# Altium PCB PCB1.PcbDoc (part 2 of 2)
Units mm, origin at the board's own origin, x right, y up, seen from the top; angles counter-clockwise.
Board outline 893.19 x 388.24 mm, 2 copper layers (Top Layer, Bottom Layer); 223 components, 120 nets, 683 pads, 243 vias.
Unrouted connection lines stored in the file: 6.
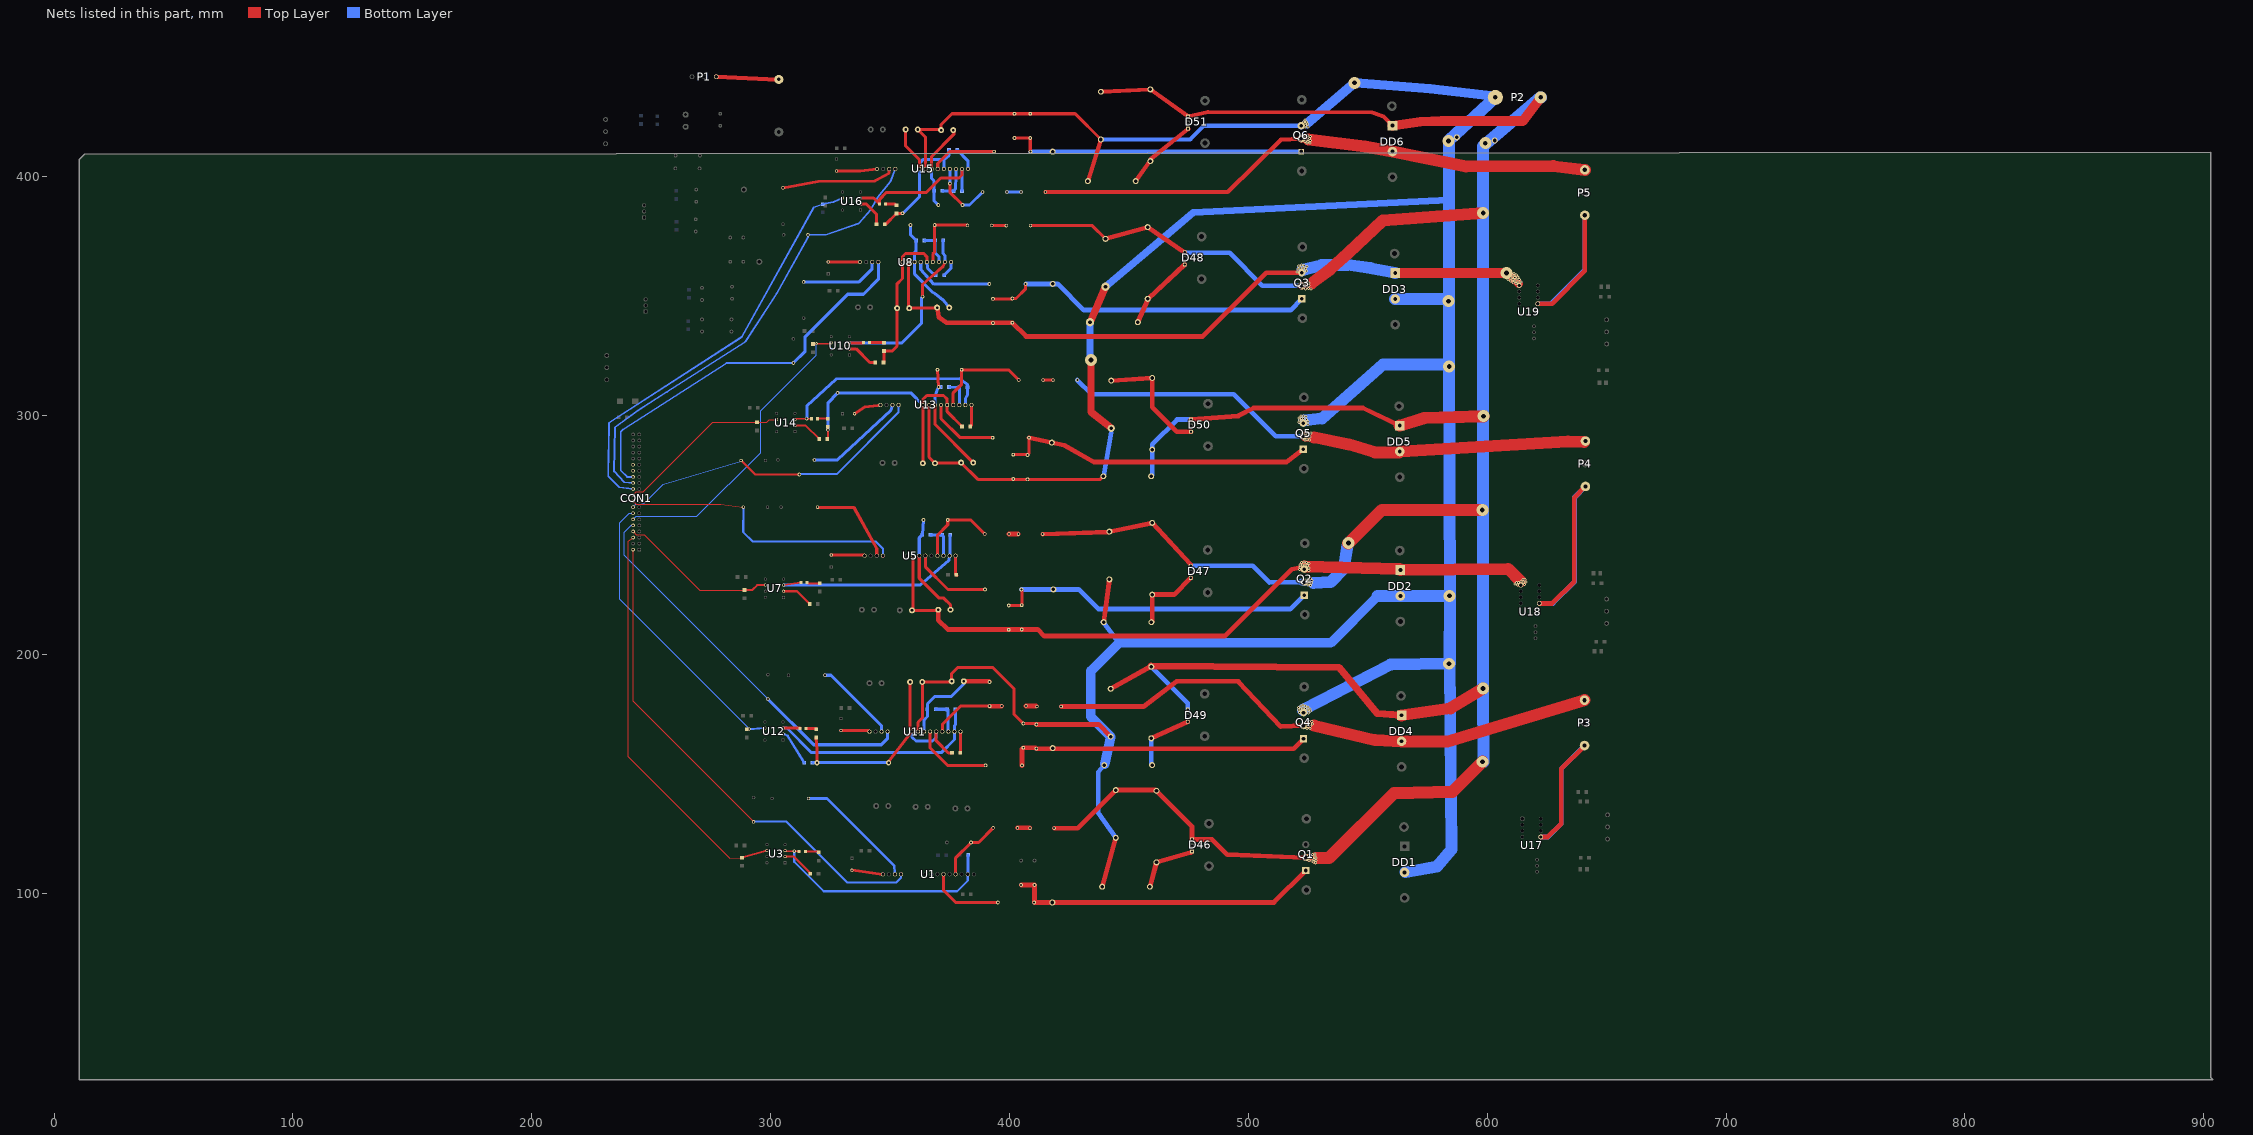
[diagram p2: the nets of this part, all layers, seen from the top]

## Via types
v1: diameter 1.27, hole 0.3, Top Layer to Bottom Layer, 178 vias
v2: diameter 2.2, hole 1, Top Layer to Bottom Layer, 18 vias
v3: diameter 5, hole 2, Top Layer to Bottom Layer, 15 vias
v4: diameter 1.524, hole 0.813, Top Layer to Bottom Layer, 13 vias
v5: diameter 1.27, hole 0.711, Top Layer to Bottom Layer, 11 vias
v6: diameter 4, hole 3.5, Top Layer to Bottom Layer, 4 vias
v7: diameter 1.778, hole 0.711, Top Layer to Bottom Layer, 2 vias
v8: diameter 1.6, hole 0.8, Top Layer to Bottom Layer, 1 vias
v9: diameter 2.032, hole 0.889, Top Layer to Bottom Layer, 1 vias

## Nets (pads, with @x,y where several pads share a name; then routed paths per layer and width w, separated by ;. In a path a pad name is that pad's centre, name@x,y a point inside that pad or via, vN(x,y) a via of type N, cw(c..) or ccw(c..) an arc to the next point about the centre after c; other vN are vias at no path point) (continued)
NetC21_2: C21.2 C22.1 D11.1 DD2.C Q2.3 R11.1 U5.9 U18.1 | length 300.7
  Top Layer w1.27: U5.9@359.664,241.3 359.664,218.948 C21.2@359.156,218.44 369.951,218.44 C22.1@370.205,218.694 ; DD2.C@563.287,235.67 DD2.C@563.626,235.331 ; v1@613.918,230.632 U18.1@614.045,228.981
  Top Layer w2: C22.1@370.205,218.694 370.205,214.376 374.142,210.439 R11.1@405.13,210.439 411.734,210.439 414.528,207.645 490.093,207.645 518.118,235.67 Q2.3@523.494,236.728
  Top Layer w5: Q2.3@523.494,236.728 DD2.C@563.287,235.67 ; DD2.C@563.626,235.331 608.711,235.839 v1@613.918,230.632
  other v1: 612.648,229.108 615.569,229.235 611.632,229.489 612.267,229.997 613.156,230.124 615.061,230.251 616.204,230.251 614.045,230.505 615.823,231.267 614.934,231.394 525.272,235.077 521.462,235.585 525.272,236.22 521.716,236.474 524.637,237.109 521.716,237.49 522.732,237.49 523.621,237.49 525.399,238.125 522.224,238.506 524.383,238.506 523.24,238.76
NetC22_2: C22.2 C24.1 D12.A U5.10 | length 44.7
  Top Layer w1.27: U5.10@362.204,241.3 362.204,231.902 370.586,223.52 372.491,223.52 375.285,220.726 C22.2@375.285,218.694
  Bottom Layer w1.27: U5.10@362.204,241.3 362.204,248.793 C24.1@363.474,250.063 D12.A@363.982,256.286
NetC23_2: C23.2 U5.16 | length 8.5
  Top Layer w1.27: U5.16@377.444,241.3 377.444,233.553 C23.2@377.952,233.045
NetC24_2: C24.2 R16.2 U5.14 | length 13.9
  Bottom Layer w1.27: C24.2@366.903,250.063 R16.2@371.729,250.063 372.364,249.428 U5.14@372.364,241.3
NetC35_1: C35.1 C37.1 R27.2 R28.2 U8.8 U8.12 | length 70.3
  Top Layer w1.27: R28.2@347.218,322.199 347.472,322.453 R27.2@347.472,327.025 350.901,327.025 352.933,329.057 C35.1@352.933,344.932 352.806,345.059 352.806,354.965 355.219,357.378 U8.8@355.219,364.236 355.219,366.522 356.489,367.792 364.109,367.792 365.379,366.522 U8.12@365.379,364.236
  Bottom Layer w1.27: U8.12@365.379,364.236 365.633,361.696 367.538,359.791 C37.1@369.062,358.902
NetC35_2: C35.2 C36.1 D22.1 DD3.C Q3.3 R23.1 U8.9 U19.1 | length 296.7
  Top Layer w1.27: U8.9@357.759,364.236 357.759,345.186 C35.2@358.013,344.932 369.443,344.932 C36.1@369.697,345.186 C36.1@369.697,345.44
  Top Layer w2: C36.1@369.697,345.44 370.332,341.249 373.761,338.836 R23.1@401.193,338.836 406.908,333.121 480.822,333.121 507.45,359.749 Q3.3@522.351,359.749 ; U19.1@613.283,354.838 U19.1@613.41,354.457
  Top Layer w3: U19.1@613.156,355.219 U19.1@613.283,354.838
  Top Layer w3.5: v3@608.203,359.664 U19.1@613.156,355.219
  Top Layer w4: DD3.C@561.467,359.664 v3@608.203,359.664
  Bottom Layer w1.27: DD3.C@561.382,359.749 DD3.C@561.467,359.664
  Bottom Layer w3: Q3.3@522.351,359.749 Q3.3@522.605,360.934
  Bottom Layer w5: Q3.3@522.605,360.934 530.606,362.966 541.528,363.093 551.053,361.696 DD3.C@561.382,359.749
  other v1: 612.013,355.219 610.87,355.6 612.902,355.981 614.045,355.981 609.727,356.362 611.632,356.362 608.711,356.997 610.743,356.997 613.41,356.997 612.394,357.124 609.854,357.505 611.505,357.759 612.775,357.886 610.743,358.394 612.14,358.775 611.124,359.41 520.319,360.045 524.383,360.426 520.7,361.315 524.002,361.442 522.859,361.696 521.716,361.823 524.51,362.458 521.081,362.585 523.367,362.712 522.224,363.093
  other v3: 608.076,359.664
NetC36_2: C36.2 C38.1 D23.A U8.10 | length 42
  Bottom Layer w1.27: D23.A@358.521,379.73 358.521,375.666 C38.1@360.934,373.253 360.934,368.935 360.299,368.3 U8.10@360.299,364.236 360.299,359.156 367.792,351.663 368.554,351.155 372.237,348.361 C36.2@374.777,345.186
NetC37_2: C37.2 U8.16 | length 6.8
  Bottom Layer w1.27: C37.2@372.491,358.648 375.412,361.569 U8.16@375.539,364.236
NetC38_2: C38.2 R29.2 U8.14 | length 14.3
  Bottom Layer w1.27: C38.2@364.363,373.253 368.681,373.253 R29.2@368.808,373.38 368.808,368.173 370.459,366.522 U8.14@370.459,364.236
NetC44_1: C44.1 C46.1 R35.2 R36.2 U11.8 U11.12 | length 108.3
  Top Layer w1.27: R35.2@319.024,165.227 319.405,160.02 v2(319.405,154.686) ; v2@348.996,154.686 349.141,154.871 U11.8@359.156,167.64 358.394,168.402 C44.1@358.394,188.468 ; U11.12@369.316,167.64 369.316,163.83 374.396,158.75 C46.1@375.92,158.75
  Bottom Layer w1.27: R36.2@317.5,154.686 v2(319.405,154.686) v2@348.996,154.686 ; U11.8@359.156,167.64 359.156,165.354 360.807,163.703 367.792,163.703 369.316,165.227 U11.12@369.316,167.64
  other v2: 349.377,154.686
NetC44_2: C44.2 C45.1 C51.2 C52.1 C58.2 C59.1 C63.1 C64.1 C65.1 C68.1 C69.1 C70.1 C71.1 C72.1 C73.1 C74.1 C75.1 C76.1 D29.1 D36.1 D42.1 DD1.A DD2.A DD3.A P2.3 pad.0@587.248,416.433 Q4.3 Q5.3 Q6.3 R32.1 R40.1 R47.1 U11.9 U13.9 U15.9 | length 1552
  Top Layer w1.27: U11.9@361.696,167.64 361.696,171.577 363.474,173.355 C44.2@363.474,188.468 375.539,188.468 C45.1@375.793,188.722 375.793,192.024 378.206,194.437 393.065,194.437 401.955,185.547 401.955,174.879 D29.1@405.765,171.069 410.845,171.069 R32.1@411.226,170.688 ; U15.9@364.871,403.225 364.871,416.433 C58.2@361.569,419.735 371.094,419.735 C59.1@371.348,419.481 371.348,421.767 375.92,426.339 D42.1@402.082,426.339 R47.1@408.686,426.339 427.482,426.339 C73.1@438.277,415.544 ; U13.9@366.268,304.419 366.268,282.575 C51.2@368.808,280.035 379.476,280.035 C52.1@379.73,280.289 386.715,273.304 D36.1@407.543,273.304 438.023,273.304 C71.1@439.293,274.574 ; C68.1@433.578,338.709 C68.1@433.705,339.09 ; Q6.3@522.097,421.344 Q6.3@522.309,421.132
  Top Layer w1.778: C74.1@432.816,398.145 C73.1@438.277,415.544
  Top Layer w2: R32.1@411.226,170.688 437.261,170.688 C69.1@442.341,165.608 ; C68.1@433.578,338.709 C68.1@433.737,339.076 ; C64.1@438.785,102.743 C63.1@444.5,123.19 ; C75.1@439.42,213.487 C65.1@441.833,231.394
  Top Layer w3: C68.1@433.737,339.076 C76.1@440.182,353.949 ; v3(434.086,323.215) 434.086,301.498 C72.1@442.468,294.894
  Bottom Layer w1.27: C75.1@439.166,213.614 C75.1@439.42,213.487 ; C71.1@439.293,274.574 C71.1@439.42,274.828 ; C70.1@439.674,153.67 C70.1@439.801,154.051
  Bottom Layer w1.778: C73.1@438.277,415.544 475.615,415.544 481.415,421.344 Q6.3@522.097,421.344
  Bottom Layer w2: C75.1@439.166,213.614 439.322,213.411 445.897,204.851 ; C71.1@439.42,274.828 442.595,292.989 ; C70.1@439.674,153.67 437.134,150.749 437.134,133.731 C63.1@444.5,123.19
  Bottom Layer w3: v3@433.578,323.342 433.705,323.469 C68.1@433.705,339.09 ; C76.1@440.182,353.949 463.804,373.888 476.758,384.937 583.932,390.271
  Bottom Layer w3.048: Q6.3@522.097,421.344 v1@524.51,422.148 ; P2.3@603.25,433.705 P2.3@603.631,433.324
  Bottom Layer w4: C70.1@439.801,154.051 C69.1@442.341,165.608 434.086,173.863 434.086,193.04 445.897,204.851 534.543,204.851 554.143,224.451 ; v1@524.51,422.148 544.576,439.293 576.199,436.753 P2.3@603.25,433.705
  Bottom Layer w5: Q4.3@522.859,176.784 559.816,195.834 ; Q5.3@523.24,297.942 530.86,298.831 556.388,321.311 v3@584,321.311 ; 554.143,224.451 DD2.A@563.626,224.451 v3@583.269,224.451 ; 559.562,195.834 584.308,196.215 585.089,118.364 578.993,111.252 DD1.A@565.785,108.839 ; DD3.A@561.467,348.784 v3@583.869,348.784
  Bottom Layer w5.08: v3@583.869,348.784 v3@583.908,348.744 ; v3@584.308,196.215 584.327,223.393 584,321.311 v3@583.908,348.744 ; P2.3@603.377,433.197 583.946,415.163 583.946,414.909 583.932,390.271 v3@583.908,348.744
  other v1: 525.145,175.514 521.335,175.641 526.034,176.276 521.081,176.657 524.891,176.657 521.843,177.165 525.78,177.165 523.875,177.292 522.859,177.546 520.954,177.8 525.018,177.927 521.97,178.435 523.875,178.435 522.859,178.816 524.891,296.291 521.208,297.18 525.018,297.434 521.462,298.069 524.256,298.323 522.224,298.704 523.113,298.704 521.208,298.958 524.129,299.593 522.097,299.72 523.113,299.847 523.748,420.751 525.018,420.878 523.875,421.386 524.764,422.021 523.748,422.148 523.113,422.91 524.383,422.91 523.748,423.672
  other v3: 583.946,196.088 584.2,224.536 584.073,320.548 583.819,347.853 583.819,414.909 544.449,439.293
NetC45_2: C45.2 C47.1 D30.A U11.10 | length 43.1
  Top Layer w1.27: D30.A@391.414,188.722 D30.A@391.668,188.468
  Top Layer w2: C45.2@380.873,188.722 D30.A@391.414,188.722
  Bottom Layer w1.27: U11.10@364.236,167.64 364.109,167.767 364.109,172.466 365.633,173.99 C47.1@365.633,177.038 365.633,179.324 368.681,182.372 375.666,182.372 380.873,187.579 C45.2@380.873,188.722
NetC46_2: C46.2 U11.16 | length 8.9
  Top Layer w1.27: C46.2@379.349,158.75 379.476,158.877 U11.16@379.476,167.64
NetC47_2: C47.2 R37.2 U11.14 | length 14.5
  Bottom Layer w1.27: C47.2@369.062,177.038 373.761,177.038 374.269,176.911 374.269,168.148 U11.14@374.396,167.64
NetC51_1: C51.1 C53.1 R42.2 R43.2 U13.8 U13.12 | length 112.2
  Top Layer w0.381: R43.2@323.723,290.195 R43.2@323.977,290.449
  Top Layer w0.762: R43.2@323.977,290.449 R42.2@323.977,295.275
  Top Layer w1.27: C51.1@363.728,280.035 U13.8@363.728,304.419 363.728,306.705 365.379,308.356 372.364,308.356 373.888,306.832 U13.12@373.888,304.419 373.888,301.625 C53.1@380.111,295.402
  Bottom Layer w1.27: v4(323.977,294.005) 323.977,305.181 v4(328.041,309.499) 358.648,309.499 U13.8@363.728,304.419
NetC52_2: C52.2 C54.1 D37.A U13.10 | length 46.7
  Top Layer w1.27: U13.10@368.808,304.419 368.808,296.291 C52.2@384.81,280.289 ; D37.A@369.824,319.151 v4(370.332,311.912)
  Bottom Layer w1.27: U13.10@368.808,304.419 368.808,307.848 369.57,310.515 v4(370.332,311.912) C54.1@371.221,311.912
NetC53_2: C53.2 U13.16 | length 9.2
  Top Layer w1.27: C53.2@383.54,295.402 384.048,295.91 U13.16@384.048,304.419
NetC54_2: C54.2 R44.2 U13.14 | length 11.7
  Bottom Layer w1.27: C54.2@374.777,311.912 379.095,311.785 379.095,308.61 378.968,307.848 U13.14@378.968,304.419
NetC58_1: C58.1 C60.1 R49.2 R50.2 U15.8 U15.12 | length 72.2
  Top Layer w1.27: R50.2@347.726,380.111 348.234,380.111 R49.2@352.679,384.556 v4@355.346,384.556 ; C58.1@356.489,419.735 356.489,412.877 362.331,407.035 U15.8@362.331,403.225
  Bottom Layer w1.27: v4@355.346,384.556 362.331,391.541 U15.8@362.331,403.225 362.331,405.384 363.728,407.162 372.618,407.162 ; U15.12@372.491,403.225 372.618,407.162 ; C60.1@374.65,411.226 374.65,408.813 372.618,407.162
  other v4: 355.219,384.683
NetC59_2: C59.2 C61.1 D43.A U15.10 | length 36.6
  Top Layer w1.27: U15.10@367.411,403.225 367.411,408.432 376.682,417.703 376.682,419.227 C59.2@376.428,419.481
  Bottom Layer w1.27: U15.10@367.411,403.225 367.284,403.098 367.284,399.415 368.427,398.272 C61.1@368.427,394.081 368.427,389.89 D43.A@370.205,388.112
NetC60_2: C60.2 U15.16 | length 9.8
  Bottom Layer w1.27: C60.2@378.079,411.226 382.524,406.654 382.651,405.892 U15.16@382.651,403.225
NetC61_2: C61.2 R51.2 U15.14 | length 14.4
  Bottom Layer w1.27: C61.2@371.856,394.081 376.555,394.081 R51.2@376.682,393.954 377.444,394.97 377.571,400.304 377.571,402.971 U15.14@377.571,403.225
NetC63_2: C63.2 C65.2 C69.2 C71.2 C73.2 C76.2 D2.2 D10.2 D20.2 D46.1 D47.1 D48.1 D49.1 D50.1 D51.1 DD4.C DD5.C DD6.C P2.1 pad.0@603.123,415.163 Q1.2 Q2.2 Q3.2 R53.2 R54.2 R55.2 R56.2 R57.2 R58.2 | length 1477
  Top Layer w1.27: D20.2@408.813,379.476 434.655,379.476 C76.2@440.182,373.949 ; C65.2@441.452,251.206 C65.2@441.833,251.394 ; R53.2@461.231,143.19 R53.2@461.518,142.903 ; D48.1@473.329,368.3 D48.1@473.583,368.173 ; D47.1@475.869,237.109 D47.1@475.869,237.617
  Top Layer w1.778: C73.2@438.277,435.544 R58.2@458.978,436.527 D51.1@474.726,425.196 483.108,427.101 551.815,426.847 556.514,425.196 DD6.C@560.324,421.386
  Top Layer w2: D10.2@413.893,250.317 C65.2@441.452,251.206 ; D2.2@418.719,127.254 428.564,127.254 C63.2@444.5,143.19 R53.2@461.231,143.19 ; C76.2@440.182,373.949 R55.2@457.835,378.869 D48.1@473.329,368.3 ; C65.2@441.833,251.394 R54.2@459.74,255.044 D47.1@475.869,237.617 ; C69.2@442.341,185.608 R56.2@459.232,195.072 ; R53.2@461.518,142.903 476.377,128.044 D46.1@476.377,122.555 484.759,122.555 491.109,116.205 Q1.2@524.002,114.914 ; D50.1@475.996,298.323 495.808,299.847 502.158,303.149 548.005,303.149 DD5.C@563.372,295.783
  Top Layer w3: R56.2@459.232,195.072 537.972,194.564 553.974,175.26 DD4.C@564.134,174.498 ; Q3.2@522.351,354.309 526.415,355.346 ; Q1.2@524.002,114.914 525.113,114.877 525.435,114.866 526.001,114.847 526.035,114.846 526.585,114.828 526.75,114.822 526.915,114.817 v1@527.177,114.808
  Top Layer w4: DD6.C@560.324,421.386 572.008,423.037 580.771,423.291 614.934,423.291 P2.1@622.377,433.197
  Top Layer w5: 526.415,355.346 534.416,361.315 541.782,368.046 556.26,381.635 v3(598.297,384.81) ; DD4.C@564.134,174.498 584.581,177.419 v3(598.17,185.674)
  Top Layer w5.08: v1@528.32,114.808 533.781,114.808 547.116,128.143 547.751,128.651 560.959,141.859 585.47,142.494 v3(598.043,155.067) ; v3@541.782,246.38 555.879,260.477 v3(597.916,260.477) ; DD5.C@563.372,295.783 573.786,298.958 v3(598.424,299.72)
  Bottom Layer w1.27: C71.2@459.293,274.574 C71.2@459.74,275.021
  Bottom Layer w2: R56.2@459.359,194.846 474.599,179.606 D49.1@474.599,176.911 ; C71.2@459.74,275.021 R57.2@459.74,285.722 459.74,287.909 470.154,298.323 D50.1@475.996,298.323 ; D48.1@473.583,368.173 492.125,368.173 505.862,354.309 Q3.2@522.351,354.309 ; D47.1@475.869,237.109 501.777,237.109 508.762,230.124 Q2.2@522.224,230.251
  Bottom Layer w3: Q2.2@522.224,230.251 527.304,229.87
  Bottom Layer w5: 527.304,229.87 534.395,230.23 539.877,235.839 v3@541.528,245.618
  Bottom Layer w5.08: v3@598.424,155.067 598.424,155.07 v3(598.17,185.674) 598.17,412.75 P2.1@622.377,433.197
  other v1: 528.193,112.776 527.304,113.157 526.542,113.538 528.32,113.665 525.399,113.792 527.431,114.173 528.32,114.681 526.034,114.808 526.923,115.062 527.939,115.57 525.145,115.824 526.034,115.824 526.796,116.205 527.812,116.459 526.034,228.854 524.891,229.108 525.399,229.743 526.415,229.87 525.399,230.505 526.542,231.013 524.891,231.521 526.034,231.775 523.875,353.06 526.288,353.06 525.145,353.187 524.256,353.917 525.272,354.457 524.256,355.092 525.399,355.473 523.621,355.727 524.637,356.108
  other v3: 541.909,246.634 599.186,414.02
NetC64_2: C64.2 D46.3 R53.1 | length 26.2
  Top Layer w1.27: C64.2@458.785,102.743 C64.2@458.857,103.124 ; D46.3@476.123,117.094 D46.3@476.377,117.475
  Top Layer w2: C64.2@458.857,103.124 R53.1@461.518,112.903 D46.3@476.123,117.094
NetC68_2: C68.2 D48.3 R55.1 | length 31.9
  Top Layer w1.27: R55.1@457.835,348.869 R55.1@458.089,348.869
  Top Layer w2: C68.2@453.705,339.09 458.089,348.869 D48.3@473.329,363.22
NetC70_2: C70.2 D49.3 R56.1 | length 28.1
  Top Layer w2: R56.1@459.359,164.846 D49.3@474.599,171.831
  Bottom Layer w1.27: C70.2@459.359,153.985 C70.2@459.674,153.67
  Bottom Layer w2: C70.2@459.359,153.985 R56.1@459.359,164.846
NetC72_2: C72.2 D50.3 R57.1 | length 50.1
  Top Layer w2: C72.2@442.341,314.579 R57.1@459.74,315.722 459.74,303.53 470.027,293.243 D50.3@475.996,293.243
NetC74_2: C74.2 D51.3 R58.1 | length 31.5
  Top Layer w1.27: R58.1@458.724,406.4 R58.1@458.978,406.527 R58.1@458.978,407.289
  Top Layer w1.778: C74.2@452.816,398.145 R58.1@458.724,406.4 ; R58.1@458.978,407.289 D51.3@474.853,419.989
NetC75_2: C75.2 D47.3 R54.1 | length 30.7
  Top Layer w1.27: C75.2@459.42,213.487 C75.2@459.74,213.807
  Top Layer w2: C75.2@459.74,213.807 R54.1@459.74,225.044 468.884,225.044 D47.3@475.869,232.029
NetCON1_2: CON1.2 D6.1 U1.4 | length 209.4
  Top Layer w0.508: CON1.2@242.443,243.84 242.443,180.34 D6.1@292.862,129.921
  Bottom Layer w0.889: D6.1@292.862,129.921 292.989,130.048 306.578,130.048 332.105,104.521 352.552,104.521 354.584,106.553 U1.4@354.584,107.95
NetCON1_6: CON1.6 R8.1 U3.6 | length 168.9
  Top Layer w0.508: CON1.6@242.443,248.92 240.284,247.269 240.284,157.226 282.956,114.681 R8.1@288.036,114.935
  Top Layer w0.889: R8.1@288.036,114.935 U3.6@298.45,117.856
NetCON1_8: CON1.8 R17.1 U7.6 | length 66.4
  Top Layer w0.381: CON1.8@242.443,251.46 243.713,250.19 247.015,250.19 270.256,226.949 R17.1@289.052,226.949
  Top Layer w0.889: R17.1@289.052,226.949 292.354,226.949 294.386,228.981 U7.6@297.815,228.981
NetCON1_10: CON1.10 D32.1 U11.4 | length 161.7
  Bottom Layer w0.508: CON1.10@242.443,254 241.554,254 238.633,251.079 238.633,241.554 D32.1@298.831,181.356
  Bottom Layer w1.27: D32.1@298.831,181.356 318.008,162.179 346.329,162.179 348.996,164.846 U11.4@348.996,167.64
NetCON1_12: CON1.12 R30.1 U10.6 | length 128.1
  Top Layer w0.381: R30.1@317.754,329.946 R30.1@317.881,330.073
  Top Layer w0.762: R30.1@317.881,330.073 v5(319.151,330.073) 324.993,330.073 U10.6@325.374,330.454
  Bottom Layer w0.381: CON1.12@242.443,256.54 243.638,257.862 269.165,257.862 295.91,284.48 295.91,302.006 319.151,325.247 v5(319.151,330.073)
NetCON1_14: CON1.14 R38.1 U12.6 | length 124
  Top Layer w0.381: v5@290.957,168.656 v5(291.084,168.783)
  Top Layer w0.762: R38.1@289.941,168.656 v5@290.957,168.656
  Bottom Layer w0.381: v5@290.957,168.656 v5(291.084,168.783)
  Bottom Layer w0.508: CON1.14@242.443,259.08 240.792,259.08 236.855,255.143 236.855,223.012 v5(291.084,168.783)
  Bottom Layer w0.889: v5@290.957,168.656 U12.6@297.561,169.164
NetCON1_16: CON1.16 D38.1 U13.4 | length 133.4
  Top Layer w0.889: D38.1@287.655,281.178 293.497,275.336 v4(312.039,275.336)
  Bottom Layer w0.381: CON1.16@242.443,261.62 241.857,261.62 243.459,262.763 244.983,262.89 246.126,263.017 247.384,263.525 255.131,271.272 D38.1@287.528,280.924
  Bottom Layer w0.889: v4@312.039,275.463 327.66,275.463 353.568,301.498 U13.4@353.568,304.419
NetCON1_18: CON1.18 D15.1 U5.4 | length 121.2
  Top Layer w0.381: CON1.18@242.443,264.16 243.713,262.89 279.146,262.89 D15.1@288.544,261.62
  Bottom Layer w0.889: D15.1@288.671,261.366 288.544,251.206 292.481,247.269 344.043,247.269 346.964,244.348 U5.4@346.964,241.3
NetCON1_20: CON1.20 R45.1 U14.6 | length 73.2
  Top Layer w0.381: CON1.20@242.443,266.7 243.788,268.045 246.582,268.045 275.717,297.18 R45.1@294.259,297.18 298.323,297.18 299.466,298.323 U14.6@302.514,298.323
NetCON1_22: CON1.22 R52.1 U16.6 | length 175.7
  Bottom Layer w0.762: CON1.22@242.443,269.24 236.601,270.002 232.029,274.574 232.283,296.926 287.909,332.867 318.135,387.223 R52.1@321.818,388.493 326.263,389.382 U16.6@330.073,391.033
NetCON1_24: CON1.24 D44.1 U15.4 | length 195.6
  Bottom Layer w0.762: CON1.24@242.443,271.78 238.633,272.034 234.442,276.606 234.823,295.021 244.602,302.133 256.667,309.907 289.474,330.962 302.514,351.028 315.595,374.396 D44.1@315.595,375.666 323.088,375.666 336.804,380.365 341.884,386.207 344.932,391.414 350.139,397.891 U15.4@352.171,403.225
NetCON1_26: CON1.26 D25.1 U8.4 | length 164.2
  Bottom Layer w0.762: CON1.26@242.443,274.32 239.903,274.32 237.241,276.982 237.241,293.121 238.379,294.259 281.559,321.945 D25.1@309.499,321.945
  Bottom Layer w1.27: D25.1@309.499,321.945 314.452,326.898 314.452,332.994 332.232,350.774 338.836,350.774 345.059,356.997 U8.4@345.059,364.236
NetCON1_28: CON1.28
NetCON1_30: CON1.30
NetD1_1: D1.1 D4.K U1.13 | length 27.8
  Top Layer w1.27: U1.13@377.444,107.95 377.444,114.808 D4.K@383.921,121.285 387.096,121.285 D1.1@393.192,127.381
NetD1_2: D1.2 D2.1 | length 5.3
  Top Layer w1.27: D2.1@408.432,127.381 D2.1@408.559,127.254
  Top Layer w2: D1.2@403.352,127.381 D2.1@408.432,127.381
NetD3_2: D3.2 pad.0@417.957,96.139 Q1.1 R1.2 R2.2 | length 132.2
  Top Layer w1.27: R1.2@410.337,96.139 R1.2@410.464,96.266
  Top Layer w2: R2.2@404.876,103.505 D3.2@410.464,103.505 R1.2@410.464,96.266 ; R1.2@410.337,96.139 510.667,96.139 Q1.1@524.002,109.474
NetD7_A: D7.A R5.1 | length 5.8
  Top Layer w0.508: R5.1@319.837,117.424 R5.1@320.167,117.094
  Top Layer w0.889: D7.A@314.503,117.424 R5.1@319.837,117.424
NetD7_K: D7.K R7.1 U1.15 U3.3 | length 101
  Top Layer w0.508: U3.3@306.07,117.856 U3.3@306.197,117.729
  Top Layer w0.889: U3.3@306.197,117.729 D7.K@311.963,117.424
  Bottom Layer w0.889: v4@309.88,117.729 309.88,113.157 322.199,100.838 378.079,100.838 382.524,105.283 U1.15@382.524,107.95
  Bottom Layer w1.27: U1.15@382.524,107.95 382.651,108.077 R7.1@382.651,116.078
  other v4: 309.88,117.602
NetD9_1: D9.1 D12.K U5.13 | length 34.7
  Top Layer w1.27: U5.13@369.824,241.3 369.824,249.936 374.142,254.254 D12.K@374.142,256.286 383.794,256.286 D9.1@389.636,250.444
NetD9_2: D9.2 D10.1 | length 4
  Top Layer w1.27: D10.1@403.606,250.444 D10.1@403.733,250.317
  Top Layer w2: D9.2@399.796,250.444 D10.1@403.606,250.444
NetD11_2: D11.2 pad.0@418.338,227.203 Q2.1 R10.2 R11.2 | length 136.4
  Top Layer w1.27: D11.2@399.669,220.472 405.003,220.472 R11.2@405.13,220.599 405.13,227.076 R10.2@405.003,227.203
  Bottom Layer w2: R10.2@405.003,227.203 429.006,227.203 437.261,218.948 517.525,218.948 Q2.1@523.367,224.79
NetD16_A: D16.A R13.1 | length 5.4
  Top Layer w0.381: D16.A@315.265,230.073 D16.A@315.595,229.743
  Top Layer w0.889: D16.A@315.595,229.743 R13.1@320.548,229.743
NetD16_K: D16.K R16.1 U5.15 U7.3 | length 91.2
  Top Layer w0.889: U7.3@305.435,228.981 D16.K@312.725,230.073
  Bottom Layer w1.27: U7.3@305.435,228.981 362.585,228.981 374.65,239.395 U5.15@374.904,241.3 375.158,241.554 R16.1@375.158,250.063
NetD19_1: D19.1 D23.K U8.13 | length 29.6
  Top Layer w1.27: U8.13@367.919,364.236 367.919,367.665 368.681,368.427 D23.K@368.681,379.73 382.27,379.73 D19.1@382.397,379.603
NetD19_2: D19.2 D20.1 | length 6.1
  Top Layer w1.27: D19.2@392.557,379.603 398.526,379.603 D20.1@398.653,379.476
NetD22_2: D22.2 pad.0@418.084,355.092 Q3.1 R19.2 R23.2 | length 139.5
  Top Layer w1.27: D22.2@393.065,348.869 401.066,348.869 R23.2@401.193,348.996 402.717,348.996 406.781,353.06 R19.2@406.781,355.092
  Bottom Layer w2: R19.2@406.781,355.092 420.116,355.092 431.038,344.17 517.652,344.17 Q3.1@522.351,348.869
NetD26_A: D26.A R27.1 | length 6.1
  Top Layer w1.27: D26.A@341.427,330.657 347.269,330.657 R27.1@347.472,330.454
NetD26_K: D26.K R29.1 U8.15 U10.3 | length 78.8
  Top Layer w1.27: U10.3@332.994,330.454 338.684,330.454 D26.K@338.887,330.657 ; v4(363.601,349.758) 363.601,354.838 372.237,362.458 U8.15@372.999,364.236
  Bottom Layer w1.27: U10.3@332.994,330.454 354.965,330.454 363.22,338.709 363.22,349.377 v4(363.601,349.758) ; R29.1@372.237,373.38 372.237,367.792 372.999,366.903 U8.15@372.999,364.236
NetD27_1: D27.1 D30.K U11.13 | length 31.1
  Top Layer w1.27: U11.13@371.856,167.64 371.856,170.688 379.476,178.308 D30.K@391.668,178.308 ; D27.1@396.621,178.308 D27.1@396.748,178.435
  Top Layer w2: D30.K@391.668,178.308 D27.1@396.621,178.308
NetD27_2: D27.2 D28.1 | length 4.7
  Top Layer w1.27: D28.1@411.226,178.435 D28.1@411.48,178.181
  Top Layer w2: D27.2@406.908,178.435 D28.1@411.226,178.435
NetD28_2: D28.2 DD4.A P3.3 Q4.2 | length 234.1
  Top Layer w2: D28.2@421.64,178.181 456.184,178.181 469.9,188.722 495.808,188.595 513.588,169.799 Q4.2@523.388,170.18
  Top Layer w3: Q4.2@523.388,170.18 527.558,170.18
  Top Layer w5: 527.558,170.18 552.958,164.084 DD4.A@564.134,163.618 583.184,163.449 P3.3@640.715,180.848
  other v1: 524.51,168.91 525.78,168.91 525.018,169.799 526.034,169.926 524.891,170.688 525.907,170.942 526.923,170.942 524.383,171.704 525.526,171.831 526.542,171.958
NetD29_2: D29.2 pad.0@418.084,160.782 Q4.1 R31.2 R32.2 | length 126.8
  Top Layer w1.27: D29.2@405.257,160.401 D29.2@405.765,160.909 ; R32.2@410.845,160.909 R32.2@411.226,160.528
  Top Layer w2: R31.2@405.257,153.543 D29.2@405.257,160.401 ; D29.2@405.765,160.909 R32.2@410.845,160.909 ; R32.2@411.226,160.528 518.922,160.528 Q4.1@523.113,164.719
NetD33_A: D33.A R35.1 | length 4.1
  Top Layer w1.27: D33.A@315.011,168.986 R35.1@319.151,168.91
NetD33_K: D33.K R37.1 U11.15 U12.3 | length 98.1
  Top Layer w1.27: U12.3@305.181,169.164 D33.K@312.293,169.164
  Bottom Layer w1.27: U12.3@305.181,169.164 306.832,169.164 317.119,158.877 371.475,158.877 376.936,164.338 U11.15@376.936,167.64 376.936,170.18 377.317,170.561 R37.1@377.317,176.911
NetD34_1: D34.1 D37.K U13.13 | length 41.9
  Top Layer w1.27: U13.13@376.428,304.419 376.428,309.499 379.984,313.055 D37.K@379.984,319.151 399.542,319.151 D34.1@403.86,314.833
NetD34_2: D34.2 D35.1 | length 4.2
  Top Layer w1.27: D34.2@414.02,314.833 D35.1@418.211,314.833
NetD35_2: D35.2 DD5.A P4.3 Q5.2 | length 222.7
  Top Layer w1.27: DD5.A@563.076,284.607 DD5.A@563.88,284.861
  Top Layer w4: Q5.2@523.875,291.211 527.558,290.848 ; P4.3@640.588,288.925 P4.3@641.096,289.306
  Top Layer w5: 527.558,290.848 542.036,287.909 553.085,284.607 DD5.A@563.076,284.607 ; DD5.A@563.88,284.861 633.857,289.052 P4.3@640.588,288.925
  Bottom Layer w2: D35.2@428.371,314.833 434.34,308.864 493.903,308.864 511.45,291.317 Q5.2@522.986,291.317
  other v1: 523.621,289.814 525.526,289.814 524.51,290.068 525.78,290.957 524.891,291.084 524.764,292.1 525.78,292.1 523.875,292.608 526.161,292.735 525.018,292.862
NetD36_2: D36.2 pad.0@417.703,288.671 Q5.1 R39.2 R40.2 | length 132.1
  Top Layer w1.27: R40.2@401.574,283.591 D36.2@407.416,283.591 ; D36.2@407.543,283.464 408.178,284.099 R39.2@408.178,290.703
  Top Layer w2: R39.2@408.178,290.703 422.91,287.528 435.229,280.543 516.001,280.543 Q5.1@522.986,285.877
NetD39_A: D39.A R42.1 | length 4.4
  Top Layer w0.381: D39.A@319.583,298.653 D39.A@319.634,298.704
  Top Layer w0.762: D39.A@319.634,298.704 R42.1@323.977,298.704
NetD39_K: D39.K R44.1 U13.15 U14.3 | length 93.4
  Top Layer w0.381: U14.3@310.134,298.323 U14.3@310.464,298.653
  Top Layer w0.762: U14.3@310.464,298.653 D39.K@317.043,298.653
  Bottom Layer w1.27: v4@315.214,298.958 315.214,304.165 327.406,315.214 379.222,315.468 381.381,313.817 382.397,313.055 382.397,308.737 381.508,306.959 U13.15@381.508,304.419
  other v4: 315.087,298.704
NetD40_1: D40.1 D43.K U15.13 | length 28
  Top Layer w1.27: v4(375.031,397.129) 375.031,393.446 D43.K@380.365,388.112
  Bottom Layer w1.27: v4(375.031,397.129) U15.13@375.031,403.225 ; D43.K@380.365,388.112 383.286,388.112 D40.1@388.747,393.573
NetD40_2: D40.2 D41.1 | length 6
  Bottom Layer w1.27: D40.2@398.907,393.573 D41.1@404.876,393.573
NetD41_2: D41.2 DD6.A P5.3 Q6.2 | length 235.9
  Top Layer w1.778: D41.2@415.036,393.573 491.363,393.573 513.588,415.417 Q6.2@522.097,415.904
  Top Layer w3.048: Q6.2@522.097,415.904 v1@525.145,415.544
  Top Layer w5: v1@525.145,415.544 548.767,412.623 DD6.A@560.324,410.506 591.185,404.241 627.634,404.368 P5.3@640.842,402.844
  other v1: 525.78,414.02 524.51,414.147 523.621,414.655 524.891,414.782 525.907,415.163 524.002,415.29 524.891,415.574 525.653,416.052 524.002,416.306 525.018,416.433 525.907,416.814 523.748,417.068 524.764,417.195
NetD42_2: D42.2 pad.0@418.084,410.464 Q6.1 R46.2 R47.2 | length 125.7
  Top Layer w1.27: D42.2@402.082,416.179 R47.2@408.686,416.179 408.686,410.591 R46.2@408.813,410.464
  Bottom Layer w2: R46.2@408.813,410.464 Q6.1@522.097,410.464
NetD45_A: D45.A R49.1 | length 4.8
  Top Layer w1.27: D45.A@348.158,388.569 352.095,388.569 R49.1@352.679,387.985
NetD45_K: D45.K R51.1 U15.15 U16.3 | length 61.4
  Top Layer w1.27: U16.3@337.693,391.033 343.154,391.033 D45.K@345.618,388.569 345.618,390.576 348.488,393.446 365.252,393.446 371.221,399.415 378.841,399.415 380.111,400.685 U15.15@380.111,403.225
  Bottom Layer w1.27: R51.1@380.111,393.954 U15.15@380.111,403.225
NetF1_1: F1.1 P1.3 | length 25.9
  Top Layer w1.778: P1.3@277.241,441.833 F1.1@303.149,440.563
NetF2_2: F2.2 U11.1 | length 12.3
  Top Layer w1.27: F2.2@329.311,168.108 340.908,168.108 U11.1@341.376,167.64
NetF3_2: F3.2 U13.1 | length 11.7
  Top Layer w1.27: F3.2@335.113,300.736 339.344,303.53 344.932,304.165 U13.1@345.948,304.419
NetF4_2: F4.2 U15.1 | length 17.1
  Top Layer w1.27: F4.2@327.533,402.376 337.606,402.376 U15.1@344.551,403.225
NetF5_2: F5.2 U1.1 | length 13.1
  Top Layer w1.27: F5.2@334.01,109.641 U1.1@346.964,107.95
NetF6_2: F6.2 U5.1 | length 14.1
  Top Layer w1.27: F6.2@325.374,241.641 339.003,241.641 U5.1@339.344,241.3
NetF7_2: F7.2 U8.1 | length 13.4
  Top Layer w1.27: F7.2@324.104,364.323 U8.1@337.352,364.323
  Bottom Layer w1.27: U8.1@337.352,364.323 U8.1@337.439,364.236
NetP3_1: P3.1 U17.5 | length 95.2
  Top Layer w2: U17.5@622.43,123.571 625.348,123.571 630.936,129.159 630.936,152.069 P3.1@640.715,161.848
  Bottom Layer w2: U17.5@622.43,123.571 625.475,123.571 630.936,129.032 630.936,152.146 640.638,161.848 P3.1@640.715,161.848
NetP4_1: P4.1 U18.5 | length 120.4
  Top Layer w2: U18.5@621.795,221.361 627.253,221.361 636.397,230.505 636.397,265.607 P4.1@641.096,270.306
  Bottom Layer w2: U18.5@621.795,221.361 627.507,221.361 636.524,230.378 636.524,265.684 641.096,270.256 P4.1@641.096,270.306
NetP5_1: P5.1 U19.5 | length 97
  Top Layer w2: U19.5@621.16,346.837 627.126,346.837 640.842,360.553 P5.1@640.842,383.844
  Bottom Layer w2: U19.5@621.16,346.837 626.618,346.837 640.842,361.061 P5.1@640.842,383.844
NetR1_1: R1.1 U1.11 | length 31.6
  Top Layer w1.27: U1.11@372.364,107.95 372.364,101.219 377.444,96.139 R1.1@395.097,96.139
NetR4_1: R4.1 U1.3 | length 51.6
  Bottom Layer w0.508: 351.79,111.506 351.793,111.442 ; U1.3@351.917,108.585 351.663,108.331 U1.3@352.044,107.95
  Bottom Layer w1.143: R4.1@315.849,139.7 323.596,139.7 351.793,111.442 ; 351.79,111.506 U1.3@351.917,108.585
NetR6_1: R6.1 U3.2 | length 13.6
  Top Layer w0.508: R6.1@316.611,108.204 R6.1@316.611,108.458
  Top Layer w0.889: U3.2@306.07,115.316 309.753,115.316 R6.1@316.611,108.458
NetR10_1: R10.1 U5.11 | length 33.5
  Top Layer w1.27: U5.11@364.744,241.3 364.744,236.728 374.269,227.203 R10.1@389.763,227.203
NetR12_1: R12.1 U5.3 | length 38
  Top Layer w1.27: R12.1@319.532,261.493 334.899,261.493 344.424,244.348 U5.3@344.424,241.3
NetR14_1: R14.1 U7.2 | length 13.1
  Top Layer w0.889: U7.2@305.435,226.441 311.023,226.441 R14.1@316.357,221.107
NetR19_1: R19.1 U8.11 | length 34.7
  Bottom Layer w1.27: U8.11@362.839,364.236 362.839,361.188 368.3,354.965 R19.1@391.668,354.965
NetR26_1: R26.1 U8.3 | length 33.4
  Bottom Layer w1.27: R26.1@314.198,355.981 337.058,355.981 342.519,361.442 U8.3@342.519,364.236
NetR28_1: R28.1 U10.2 | length 13.2
  Top Layer w1.27: U10.2@332.994,327.914 335.788,327.914 341.503,322.199 R28.1@343.789,322.199
NetR31_1: R31.1 U11.11 | length 33.1
  Top Layer w1.27: U11.11@366.776,167.64 366.776,160.782 374.015,153.543 R31.1@390.017,153.543
NetR33_1: R33.1 U11.3 | length 34.9
  Bottom Layer w1.27: R33.1@322.707,191.262 325.247,191.262 346.456,170.053 U11.3@346.456,167.64
NetR36_1: R36.1 U12.2 | length 15.3
  Bottom Layer w1: U12.2@305.181,166.624 305.684,166.624 307.086,165.862 R36.1@314.071,154.686
NetR39_1: R39.1 U13.11 | length 30.5
  Top Layer w1.27: U13.11@371.348,304.419 371.348,298.704 379.349,290.703 R39.1@392.811,290.703
NetR41_1: R41.1 U13.3 | length 42.6
  Bottom Layer w1.27: R41.1@318.262,281.432 328.041,281.432 350.393,302.26 U13.3@351.028,304.419
NetR43_1: R43.1 U14.2 | length 12.5
  Top Layer w0.762: U14.2@310.134,295.783 314.706,295.783 R43.1@320.294,290.195
NetR46_1: R46.1 U15.11 | length 28
  Top Layer w1.27: U15.11@369.951,403.225 369.951,405.511 374.904,410.464 R46.1@393.573,410.464
NetR48_1: R48.1 U15.3 | length 47.3
  Top Layer w1.27: R48.1@305.181,395.351 319.786,398.018 343.662,398.272 349.631,401.447 U15.3@349.631,403.225
NetR50_1: R50.1 U16.2 | length 12.5
  Top Layer w1.27: U16.2@337.693,388.493 340.106,388.493 344.297,384.302 R50.1@344.297,380.111
pads on no net: D46. D46.2 D47. D47.2 D48. D48.2 D49. D49.2 D50. D50.2 D51. D51.2 DD1. DD2. DD3. DD4. DD5. DD6. P1.2 P2.2 P3.2 P4.2 P5.2 P9.2 P10.2 Q1. Q2. Q3. Q4. Q5. Q6. U3.1 U3.4 U3.7 U7.1 U7.4 U7.7 U10.1 U10.4 U10.7 U12.1 U12.4 U12.7 U14.1 U14.4 U14.7 U16.1 U16.4 U16.7 U17.2 U17.3 U17.4 U17.6 U17.7 U17.8 U18.2 U18.3 U18.4 U18.6 U18.7 U18.8 U19.2 U19.3 U19.4 U19.6 U19.7 U19.8
copper on no net:
  other v6: 240,100 650,100 240,440 650,440

## Polygon pours and split planes (outlines as drawn)
GND on Bottom Layer "Bottom Layer-No Net" (hatched 90Degree grid 0.381 track 0.279, remove dead copper, pour order 10): 254.508,427.99 254.508,443.216 257.136,443.216 257.298,443.283 261.562,447.548 418.338,447.548 420.37,445.516 420.878,445.008 420.878,94.488 418.084,91.694 255.651,91.694 253.746,93.599 252.984,94.361 252.984,112.903 251.333,114.554 250.825,114.046 230.378,114.046 230.378,114.554 229.235,115.697 229.362,115.824 229.362,427.101 230.759,428.498 231.267,427.99
GND on Top Layer "Bottom Layer-No Net" (hatched 90Degree grid 0.381 track 0.254, remove dead copper, pour order 14): 254.381,428.879 254.127,429.133 254.127,442.976 254.254,442.976 258.318,447.04 418.084,447.04 418.592,447.04 421.259,444.373 420.878,443.992 420.878,98.552 415.544,93.218 415.036,92.71 255.016,92.71 254.254,92.71 252.73,94.234 252.857,94.361 252.857,112.776 231.775,112.776 229.87,114.681 229.87,427.355 229.87,427.99 230.886,429.006 231.14,428.752 254.127,428.752

## Keep-outs
Keep-Out Layer:
  lines w0.254: 227,90 657,90 657,450 227,450 227,90

## Silkscreen, mask and mechanical layers (free items; w line width, h text height)
Top Overlay:
  circle w0.254: c240,100 r5
  circle w0.254: c240,440 r5
  circle w0.254: c650,440 r5
  circle w0.254: c650,100 r5
  circle w0.762: c288.831,394.589 r3.269
  circle w0.762: c295.308,364.363 r3.269
  circle w0.762: c417.99,96.139 r3.269
  circle w0.762: c418.117,160.782 r3.269
  circle w0.762: c418.371,227.203 r3.269
  circle w0.762: c417.736,288.671 r3.269
  circle w0.762: c418.117,355.092 r3.269
  circle w0.762: c418.117,410.464 r3.269
  circle w0.762: c603.283,415.163 r3.269
  circle w0.762: c587.281,416.433 r3.269
  lines w0.254: 232.537,372.999 255.537,372.999 ; 232.664,358.375 232.664,333.375 255.664,333.375 ; 232.664,358.394 255.664,358.394 ; 232.664,372.999 232.664,397.999 ; 232.664,398.018 255.664,398.018 ; 242.443,287.017 242.443,289.56 242.443,292.103 ; 244.983,287.017 244.983,289.56 244.983,292.103 ; 255.651,333.394 255.651,358.394 ; 255.651,373.018 255.651,398.018
  lines w1.27: 421.64,91.44 421.64,447.548
  text "24V" at 279.4,448.818 h1.52 r180
  text "GND" at 268.351,448.691 h1.52 r180
  text "Danger   NO touch  !" at 533.527,446.532 h2.54 r180
  text "Danger   NO touch  !" at 370.84,445.516 h2.54 r180
  text "GND" at 237.363,427.101 h1.52 r270
  text "C" at 603.123,426.72 h1.52 r180
  text "A" at 622.935,426.72 h1.52 r180
  text "DC300V-" at 584.962,422.91 h1.52
  text "TEST" at 584.962,420.497 h1.52
  text "5V" at 237.49,415.163 h1.52 r270
  text "C-" at 424.307,411.353 h1.52
  text "DC300V+" at 606.552,410.845 h1.52
  text "TEST" at 422.91,408.813 h1.52
  text "TEST" at 606.425,408.432 h1.52
  text "C-" at 632.968,401.955 h1.52 r90
  text "5V" at 287.909,388.747 h1.52
  text "TEST" at 286.512,386.207 h1.52
  text "C+" at 633.984,383.159 h1.52 r90
  text "15V" at 294.386,358.521 h1.52
  text "TEST" at 292.989,355.981 h1.52
  text "C+" at 424.307,355.981 h1.52
  text "TEST" at 422.91,353.441 h1.52
  text "-15V" at 643.763,338.963 h1.52 r90
  text "OUT" at 643.636,332.994 h1.52 r90
  text "15V" at 239.141,327.406 h1.52 r270
  text "+15V" at 643.89,325.374 h1.52 r90
  text "GND" at 239.014,317.119 h1.52 r270
  text "B-" at 423.926,289.56 h1.52
  text "B-" at 634.365,288.417 h1.52 r90
  text "TEST" at 422.529,287.02 h1.52
  text "B+" at 635.381,269.621 h1.52 r90
  text "Danger   NO touch  !" at 624.078,264.414 h2.54 r90
  text "B+" at 424.561,228.092 h1.52
  text "TEST" at 423.164,225.552 h1.52
  text "-15V" at 644.271,221.742 h1.52 r90
  text "OUT" at 644.144,215.773 h1.52 r90
  text "+15V" at 644.398,208.153 h1.52 r90
  text "A-" at 633.349,179.959 h1.52 r90
  text "A-" at 424.307,161.671 h1.52
  text "A+" at 633.857,161.163 h1.52 r90
  text "TEST" at 422.91,159.131 h1.52
  text "-15V" at 645.16,132.588 h1.52 r90
  text "OUT" at 645.033,126.619 h1.52 r90
  text "+15V" at 645.287,118.999 h1.52 r90
  text "A+" at 424.18,97.028 h1.52
  text "SDU_SR_DRIVE_1.0" at 266.827,96.774 h1.52
  text "Danger   NO touch  !" at 304.546,96.139 h2.54
  text "TEST" at 422.783,94.488 h1.52
  text "Danger   NO touch  !" at 590.55,94.361 h2.54

## Text inside footprints (layer, text, board x,y; h text height)
CON1: Top Overlay "2" at 242.951,240.792 h1.27 r90; Top Overlay "1" at 245.491,241.3 h1.27 r90; Top Overlay "35" at 248.307,286.975 h1.27 r90; Top Overlay "36" at 240.687,286.721 h1.27 r90
DD1: Top Overlay "C" at 561.34,120.65 h1.52 r180; Top Overlay "A" at 561.34,108.458 h1.52 r180
DD2: Top Overlay "C" at 559.562,236.347 h1.52 r180; Top Overlay "A" at 559.562,224.155 h1.52 r180
DD3: Top Overlay "C" at 557.403,360.68 h1.52 r180; Top Overlay "A" at 557.403,348.488 h1.52 r180
DD4: Top Overlay "C" at 560.07,175.514 h1.52 r180; Top Overlay "A" at 560.07,163.322 h1.52 r180
DD5: Top Overlay "C" at 559.308,296.799 h1.52 r180; Top Overlay "A" at 559.308,284.607 h1.52 r180
DD6: Top Overlay "C" at 556.26,422.402 h1.52 r180; Top Overlay "A" at 556.26,410.21 h1.52 r180
Q1: Top Overlay "3" at 528.066,120.65 h1.52; Top Overlay "2" at 527.939,114.046 h1.52; Top Overlay "1" at 528.066,108.458 h1.52
Q2: Top Overlay "3" at 527.431,235.966 h1.52; Top Overlay "2" at 527.304,229.362 h1.52; Top Overlay "1" at 527.431,223.774 h1.52
Q3: Top Overlay "3" at 526.415,360.045 h1.52; Top Overlay "2" at 526.288,353.441 h1.52; Top Overlay "1" at 526.415,347.853 h1.52
Q4: Top Overlay "3" at 527.177,175.895 h1.52; Top Overlay "2" at 527.05,169.291 h1.52; Top Overlay "1" at 527.177,163.703 h1.52
Q5: Top Overlay "3" at 527.05,297.053 h1.52; Top Overlay "2" at 526.923,290.449 h1.52; Top Overlay "1" at 527.05,284.861 h1.52
Q6: Top Overlay "3" at 526.161,421.64 h1.52; Top Overlay "2" at 526.034,415.036 h1.52; Top Overlay "1" at 526.161,409.448 h1.52
U1: Top Overlay "16" at 384.429,109.982 h1.52; Top Overlay "8" at 363.22,110.109 h1.52; Top Overlay "1" at 346.71,110.236 h1.52
U2: Top Overlay "1" at 251.325,343.285 h1.5 r90; Top Overlay "2" at 251.325,348.115 h1.5 r90; Top Overlay "3" at 251.325,345.575 h1.5 r90
U4: Top Overlay "1" at 250.69,382.655 h1.5 r90; Top Overlay "2" at 250.69,387.485 h1.5 r90; Top Overlay "3" at 250.69,384.945 h1.5 r90
U5: Top Overlay "1" at 339.09,243.586 h1.52; Top Overlay "8" at 355.6,243.459 h1.52; Top Overlay "16" at 376.809,243.332 h1.52
U8: Top Overlay "16" at 374.904,366.268 h1.52; Top Overlay "8" at 353.695,366.395 h1.52; Top Overlay "1" at 337.185,366.522 h1.52
U11: Top Overlay "1" at 341.122,169.926 h1.52; Top Overlay "8" at 357.632,169.799 h1.52; Top Overlay "16" at 378.841,169.672 h1.52
U13: Top Overlay "16" at 383.413,306.451 h1.52; Top Overlay "8" at 362.204,306.578 h1.52; Top Overlay "1" at 345.694,306.705 h1.52
U15: Top Overlay "16" at 382.016,405.257 h1.52; Top Overlay "8" at 360.807,405.384 h1.52; Top Overlay "1" at 344.297,405.511 h1.52
U17: Top Overlay "O" at 617.855,109.347 h1.52 r270; Top Overlay "+" at 617.855,111.887 h1.52 r270; Top Overlay "-" at 617.855,114.681 h1.52 r270; Top Overlay "8" at 623.57,131.699 h1.52 r270; Top Overlay "7" at 623.57,128.905 h1.52 r270; Top Overlay "6" at 623.443,126.619 h1.52 r270; Top Overlay "5" at 623.443,124.079 h1.52 r270; Top Overlay "4" at 611.759,123.952 h1.52 r270; Top Overlay "3" at 611.759,126.365 h1.52 r270; Top Overlay "2" at 611.886,128.778 h1.52 r270; Top Overlay "1" at 611.886,131.318 h1.52 r270
U18: Top Overlay "O" at 617.22,207.137 h1.52 r270; Top Overlay "+" at 617.22,209.677 h1.52 r270; Top Overlay "-" at 617.22,212.471 h1.52 r270; Top Overlay "8" at 622.935,229.489 h1.52 r270; Top Overlay "7" at 622.935,226.695 h1.52 r270; Top Overlay "6" at 622.808,224.409 h1.52 r270; Top Overlay "5" at 622.808,221.869 h1.52 r270; Top Overlay "4" at 611.124,221.742 h1.52 r270; Top Overlay "3" at 611.124,224.155 h1.52 r270; Top Overlay "2" at 611.251,226.568 h1.52 r270; Top Overlay "1" at 611.251,229.108 h1.52 r270
U19: Top Overlay "O" at 616.585,332.613 h1.52 r270; Top Overlay "+" at 616.585,335.153 h1.52 r270; Top Overlay "-" at 616.585,337.947 h1.52 r270; Top Overlay "8" at 622.3,354.965 h1.52 r270; Top Overlay "7" at 622.3,352.171 h1.52 r270; Top Overlay "6" at 622.173,349.885 h1.52 r270; Top Overlay "5" at 622.173,347.345 h1.52 r270; Top Overlay "4" at 610.489,347.218 h1.52 r270; Top Overlay "3" at 610.489,349.631 h1.52 r270; Top Overlay "2" at 610.616,352.044 h1.52 r270; Top Overlay "1" at 610.616,354.584 h1.52 r270